# EAGLE board freiBot (EAGLE 6.5.0)
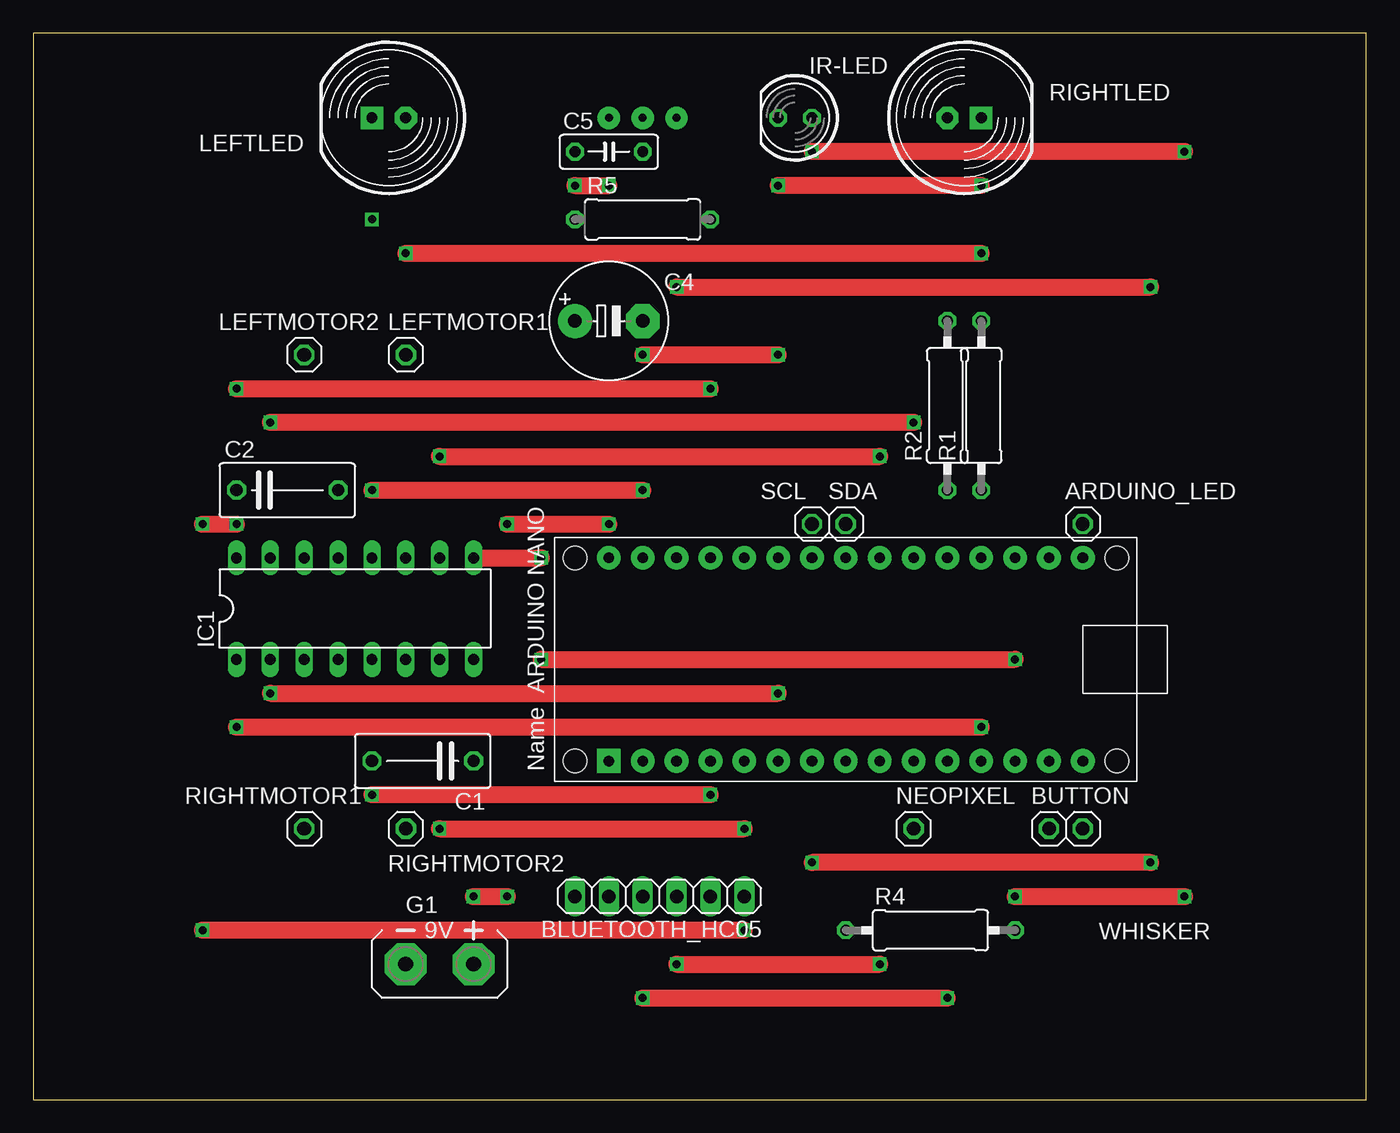
[diagram p0: board, top side]
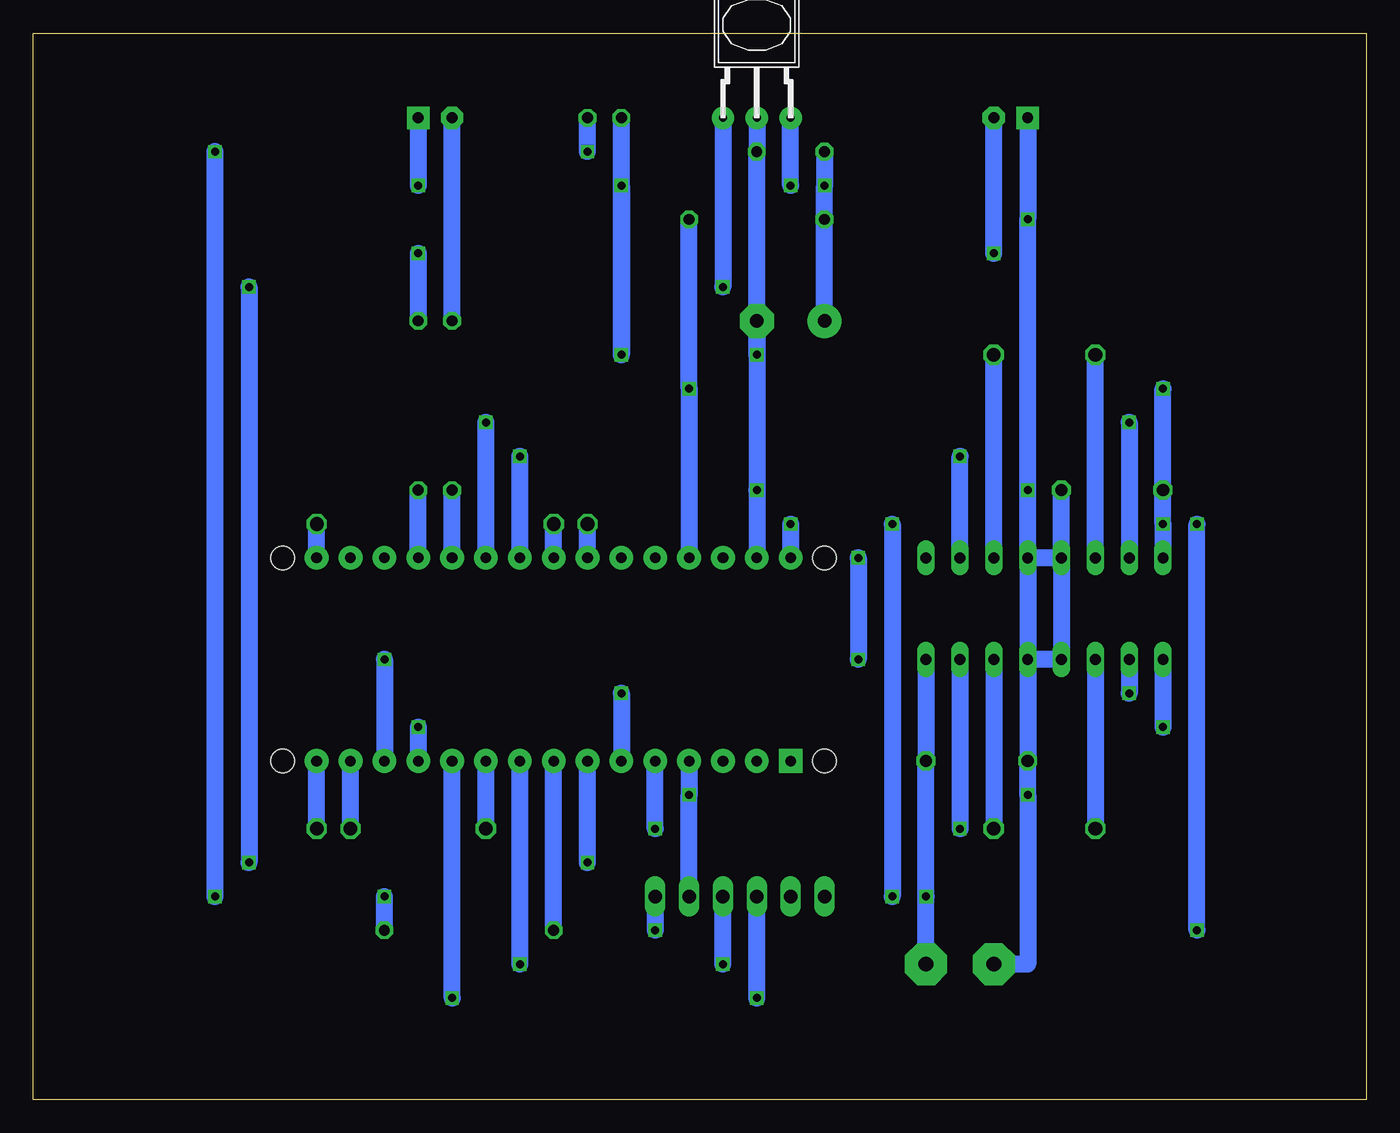
[diagram p1: board, bottom side, seen from below]

Size 100 x 80 mm. Coordinates in mm from the lower left corner, seen from the top.
Outline: 0,0 100,0 100,80 0,80 0,0
Copper layers (1*16): Top 0.035mm / dielectric 1.5mm / Bottom 0.035mm
Design rules "default": minimum track width 10mil, minimum drill 24mil, track to track 8mil, track to pad 8mil, pad to pad 8mil, via to via 8mil, smd to smd 8mil, copper to edge 40mil, drill to drill 8mil, minimum pad ring 10mil, minimum via ring 8mil, stop-mask expansion 4mil, vias tented up to drill 0mil, thermal gap 10mil

## Footprints (pad centres in the part's own frame; a part is rotated, then mirrored left to right if it is on the bottom)
1X01 = drill 1.016 octagon: 1 0,0
1X06 = drill 1.016 long: 1 -6.35,0; 2 -3.81,0; 3 -1.27,0; 4 1.27,0; 5 3.81,0; 6 6.35,0
C075-042X103 = drill 0.914 octagon: 1 -3.81,0; 2 3.81,0
E5-8,5 = drill 1.016 pad 2.54: + -2.54,0 | drill 1.016 pad 2.54 octagon: - 2.54,0
C050-025X075 = drill 0.813 octagon: 1 -2.54,0; 2 2.54,0
AB9V = drill 1.118 pad 3.15 octagon: + 0,2.54; - 0,-2.54
DIL16 = drill 0.813 long: 1 -8.89,-3.81; 2 -6.35,-3.81; 3 -3.81,-3.81; 4 -1.27,-3.81; 5 1.27,-3.81; 6 3.81,-3.81; 7 6.35,-3.81; 8 8.89,-3.81; 9 8.89,3.81; 10 6.35,3.81; 11 3.81,3.81; 12 1.27,3.81; 13 -1.27,3.81; 14 -3.81,3.81; 15 -6.35,3.81; 16 -8.89,3.81
SFH511* = drill 0.61 pad 1.676: 1 -2.54,0; 2 0,0; 3 2.54,0
LED5MM = drill 0.813 octagon: A -1.27,0; K 1.27,0
LED10MM = drill 0.813 pad 1.676 octagon: A -1.27,0 | drill 0.813 pad 1.676 square: K 1.27,0
0309/12 = drill 0.813 octagon: 1 -6.35,0; 2 6.35,0
0309/10 = drill 0.813 octagon: 1 -5.08,0; 2 5.08,0
PDIP-32 = drill 0.8 pad 1.778: 3V3 15.24,-35.56; +5V 15.24,-10.16; A0 15.24,-30.48; A1 15.24,-27.94; A2 15.24,-25.4; A3 15.24,-22.86; A4 15.24,-20.32; A5 15.24,-17.78; A6 15.24,-15.24; A7 15.24,-12.7; AREF 15.24,-33.02; D0/RX 0,-5.08; D2 0,-12.7; D3 0,-15.24; D4 0,-17.78; D5 0,-20.32; D6 0,-22.86; D7 0,-25.4; D8 0,-27.94; D9 0,-30.48; D10 0,-33.02; D11 0,-35.56; D12 0,-38.1; D13 15.24,-38.1; GND 0,-10.16; GND1 15.24,-5.08; RESET 0,-7.62; RESET1 15.24,-7.62; VIN 15.24,-2.54 | drill 0.8 pad 1.778 square: D1/TX 0,-2.54 | hole 1.778: 0,0; 0,-40.64; 15.24,-40.64; 15.24,0

## Placement (x,y rotation side)
ARDUINO_LED  [1X01]  78.74,43.18 0 top
BLUETOOTH_HC05  [1X06]  46.99,15.24 180 top
BUTTON  [1X01]  76.2,20.32 0 top
C1  220n  [C075-042X103]  29.21,25.4 180 top
C2  220n  [C075-042X103]  19.05,45.72 0 top
C4  [E5-8,5]  43.18,58.42 0 top
C5  100n  [C050-025X075]  43.18,71.12 0 top
G1  AB9V  [AB9V]  30.48,10.16 270 top
IC1  L293D  [DIL16]  24.13,36.83 0 top
IR1  [SFH511*]  45.72,73.66 0 bottom
IR-LED  [LED5MM]  57.15,73.66 180 top
LEFTLED  [LED10MM]  26.67,73.66 180 top
LEFTMOTOR1  [1X01]  27.94,55.88 0 top
LEFTMOTOR2  [1X01]  20.32,55.88 0 top
NEOPIXEL  [1X01]  66.04,20.32 0 top
R1  270  [0309/12]  71.12,52.07 90 top
R2  270  [0309/12]  68.58,52.07 90 top
R4  270  [0309/12]  67.31,12.7 0 top
R5  100  [0309/10]  45.72,66.04 0 top
RIGHTLED  [LED10MM]  69.85,73.66 0 top
RIGHTMOTOR1  [1X01]  20.32,20.32 0 top
RIGHTMOTOR2  [1X01]  27.94,20.32 0 top
SCL  [1X01]  58.42,43.18 0 top
SDA  [1X01]  60.96,43.18 0 top
U$1  ARDUINONANO  [PDIP-32]  40.64,25.4 90 top
WHISKER  [1X01]  78.74,20.32 0 top

## Library data of the parts
ARDUINO_LED BLUETOOTH_HC05 BUTTON LEFTMOTOR1 LEFTMOTOR2 NEOPIXEL RIGHTMOTOR1 RIGHTMOTOR2 SCL SDA WHISKER = pinhead
C1 C2 C4 C5 R1 R2 R4 R5 = rcl
G1 = battery
IC1 = st-microelectronics; MPN: L293D; OC_FARNELL: 9589619; OC_NEWARK: 56P8249
IR1 IR-LED = 0-svo
LEFTLED RIGHTLED = led
U$1 = jet-lib

## Nets
+5V: BLUETOOTH_HC05.1 C2.1 IC1.16 R5.2 U$1.+5V
BLUE_KEY: BLUETOOTH_HC05.5
BLUE_LED: BLUETOOTH_HC05.6
BLUE_RXD_ARDUINO_TXD: BLUETOOTH_HC05.4 U$1.D8
BLUE_TXD_ARDUINO_RXD: BLUETOOTH_HC05.3 U$1.D6
GND: BLUETOOTH_HC05.2 C1.2 C2.2 C4.- C5.2 G1.- IC1.4 IC1.5 IC1.12 IC1.13 IR1.2 IR-LED.K LEFTLED.K RIGHTLED.K U$1.GND U$1.GND1
N$1: IC1.7 U$1.D2
N$2: IC1.2 U$1.D3
N$3: IC1.1 U$1.D9
N$4: IC1.3 RIGHTMOTOR1.1
N$5: IC1.9 U$1.D10
N$6: IC1.10 U$1.A3
N$7: IC1.15 U$1.A2
N$8: IC1.6 RIGHTMOTOR2.1
N$9: IC1.11 LEFTMOTOR1.1
N$10: IC1.14 LEFTMOTOR2.1
N$11: C1.1 G1.+ IC1.8 U$1.VIN
N$12: IR-LED.A R4.2
N$13: R1.1 U$1.A0
N$14: R2.1 U$1.A1
N$15: R2.2 RIGHTLED.A
N$16: LEFTLED.A R1.2
N$17: SDA.1 U$1.A4
N$18: SCL.1 U$1.A5
N$19: ARDUINO_LED.1 U$1.D13
N$20: U$1.D12 WHISKER.1
N$21: BUTTON.1 U$1.D11
N$22: NEOPIXEL.1 U$1.D7
N$23: IR1.1 U$1.D4
N$24: R4.1 U$1.D5
VCC: C4.+ C5.1 IR1.3 R5.1

## Tracks (layer width: path | path; a pad name or v marks a point on that pad's centre or on a via)
+5V  (via drill 0.6)
  Top 1.27: v15.24,53.34 v50.8,53.34 | v53.34,12.7 v12.7,12.7 | v12.7,43.18 v15.24,43.18
  Bottom 1.27: v15.24,53.34 C2.1 v15.24,43.18 IC1.16 | U$1.+5V v50.8,53.34 R5.2 | BLUETOOTH_HC05.1 v53.34,12.7 | v12.7,12.7 v12.7,43.18
BLUE_RXD_ARDUINO_TXD  (via drill 0.6)
  Top 1.27: v45.72,7.62 v68.58,7.62
  Bottom 1.27: v68.58,7.62 U$1.D8 | v45.72,7.62 BLUETOOTH_HC05.4
BLUE_TXD_ARDUINO_RXD  (via drill 0.6)
  Top 1.27: v48.26,10.16 v63.5,10.16
  Bottom 1.27: v63.5,10.16 U$1.D6 | v48.26,10.16 BLUETOOTH_HC05.3
GND  (via drill 0.6)
  Top 1.27: v25.4,45.72 v45.72,45.72 | v50.8,22.86 v25.4,22.86 | v45.72,55.88 v55.88,55.88 | v71.12,68.58 v55.88,68.58
  Bottom 1.27: IC1.13 IC1.12 | IC1.12 IC1.5 | IC1.5 IC1.4 IC1.13 | IC1.13 C2.2 | IC1.12 v25.4,45.72 v25.4,66.04 LEFTLED.K | U$1.GND1 v45.72,45.72 C4.- v45.72,55.88 C5.2 IR1.2 | G1.- 25.4,10.16 v25.4,22.86 C1.2 IC1.5 | U$1.GND v50.8,22.86 BLUETOOTH_HC05.2 | IR-LED.K v55.88,55.88 v55.88,68.58 | RIGHTLED.K v71.12,68.58
N$1  (via drill 0.6)
  Top 1.27: v30.48,20.32 v53.34,20.32
  Bottom 1.27: IC1.7 v30.48,20.32 | v53.34,20.32 U$1.D2
N$2  (via drill 0.6)
  Top 1.27: v17.78,30.48 v55.88,30.48
  Bottom 1.27: IC1.2 v17.78,30.48 | v55.88,30.48 U$1.D3
N$3  (via drill 0.6)
  Top 1.27: v15.24,27.94 v71.12,27.94
  Bottom 1.27: IC1.1 v15.24,27.94 | v71.12,27.94 U$1.D9
N$4
  Bottom 1.27: IC1.3 RIGHTMOTOR1.1
N$5  (via drill 0.6)
  Top 1.27: IC1.9 v38.1,40.64 | v38.1,33.02 v73.66,33.02
  Bottom 1.27: v38.1,40.64 v38.1,33.02 | v73.66,33.02 U$1.D10
  other vias: 33.02,40.64
N$6  (via drill 0.6)
  Top 1.27: v30.48,48.26 v63.5,48.26
  Bottom 1.27: U$1.A3 v63.5,48.26 | IC1.10 v30.48,48.26
N$7  (via drill 0.6)
  Top 1.27: v66.04,50.8 v17.78,50.8
  Bottom 1.27: U$1.A2 v66.04,50.8 | v17.78,50.8 IC1.15
N$8
  Bottom 1.27: IC1.6 RIGHTMOTOR2.1
N$9
  Bottom 1.27: IC1.11 LEFTMOTOR1.1
N$10
  Bottom 1.27: IC1.14 LEFTMOTOR2.1
N$11  (via drill 0.6)
  Top 1.27: v35.56,43.18 v43.18,43.18 | v33.02,15.24 v35.56,15.24
  Bottom 1.27: IC1.8 C1.1 v33.02,15.24 G1.+ | v43.18,43.18 U$1.VIN | v35.56,43.18 v35.56,15.24
N$12  (via drill 0.6)
  Top 1.27: v73.66,15.24 v86.36,15.24 | v86.36,71.12 v58.42,71.12
  Bottom 1.27: R4.2 v73.66,15.24 | v86.36,15.24 v86.36,71.12 | v58.42,71.12 IR-LED.A
N$13
  Bottom 1.27: U$1.A0 R1.1
N$14
  Bottom 1.27: U$1.A1 R2.1
N$15
  Bottom 1.27: R2.2 RIGHTLED.A
N$16  (via drill 0.6)
  Top 1.27: v27.94,63.5 v71.12,63.5
  Bottom 1.27: v27.94,63.5 LEFTLED.A | v71.12,63.5 R1.2
N$17
  Bottom 1.27: U$1.A4 SDA.1
N$18
  Bottom 1.27: U$1.A5 SCL.1
N$19
  Bottom 1.27: U$1.D13 ARDUINO_LED.1
N$20
  Bottom 1.27: WHISKER.1 U$1.D12
N$21
  Bottom 1.27: BUTTON.1 U$1.D11
N$22
  Bottom 1.27: NEOPIXEL.1 U$1.D7
N$23  (via drill 0.6)
  Top 1.27: v48.26,60.96 v83.82,60.96 | v83.82,17.78 v58.42,17.78
  Bottom 1.27: IR1.1 v48.26,60.96 | v83.82,60.96 v83.82,17.78 | v58.42,17.78 U$1.D4
N$24
  Bottom 1.27: R4.1 U$1.D5
VCC  (via drill 0.6)
  Top 1.27: v40.64,68.58 v43.18,68.58
  Bottom 1.27: C4.+ R5.1 v40.64,68.58 C5.1 | v43.18,68.58 IR1.3